# Altium PCB BPD30M.PcbDoc (part 1 of 2)
Units mm, origin at the board's own origin, x right, y up, seen from the top; angles counter-clockwise.
Board outline 65 x 70 mm, 4 copper layers (Top Layer, Ground, Power, Bottom Layer), stack 0.603 mm thick; 94 components, 61 nets, 303 pads, 160 vias.
Unrouted connection lines stored in the file: 9.
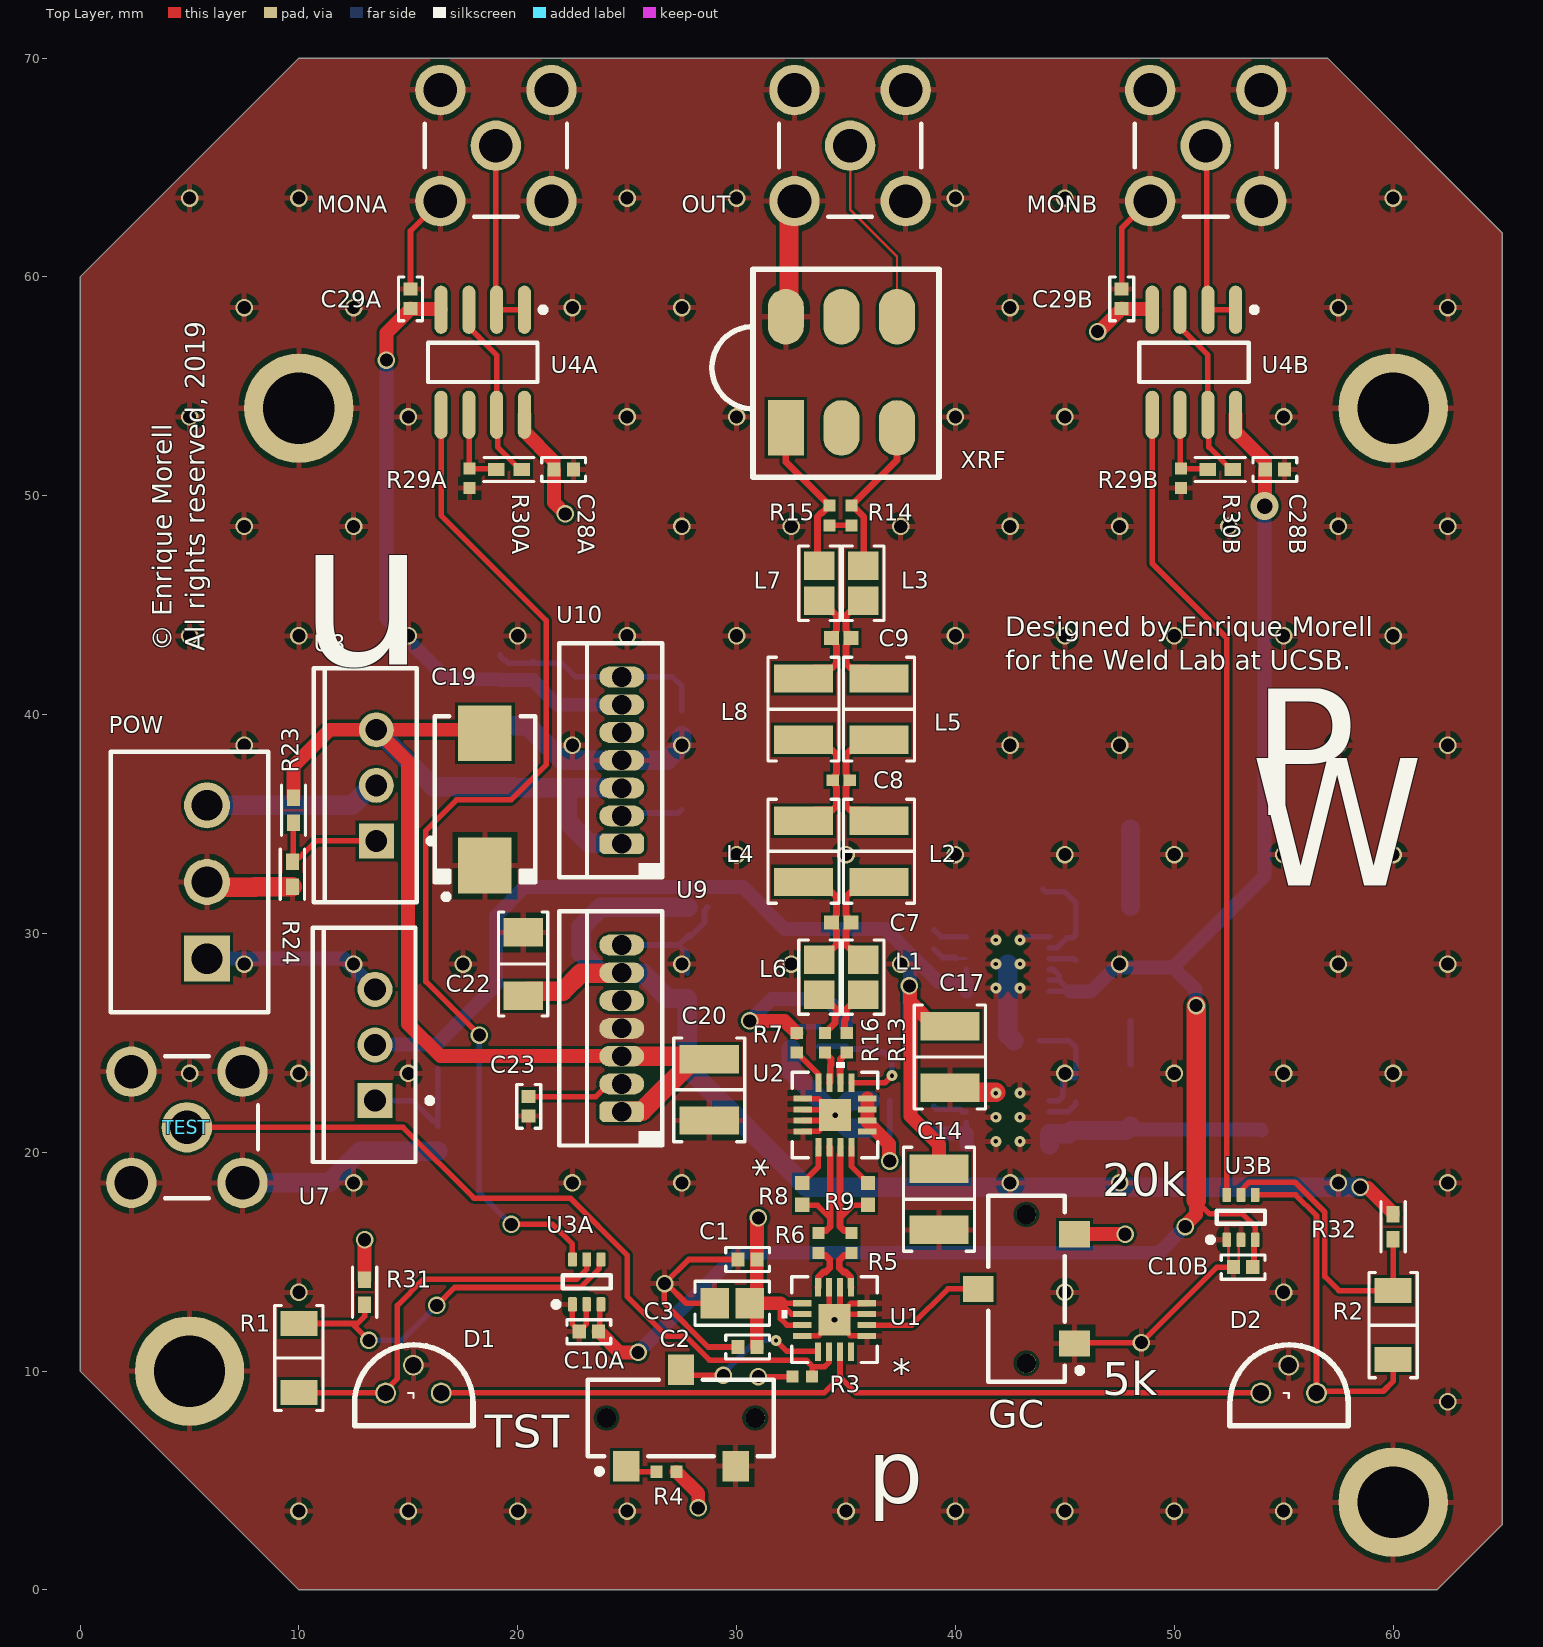
[diagram p0: Top Layer view]
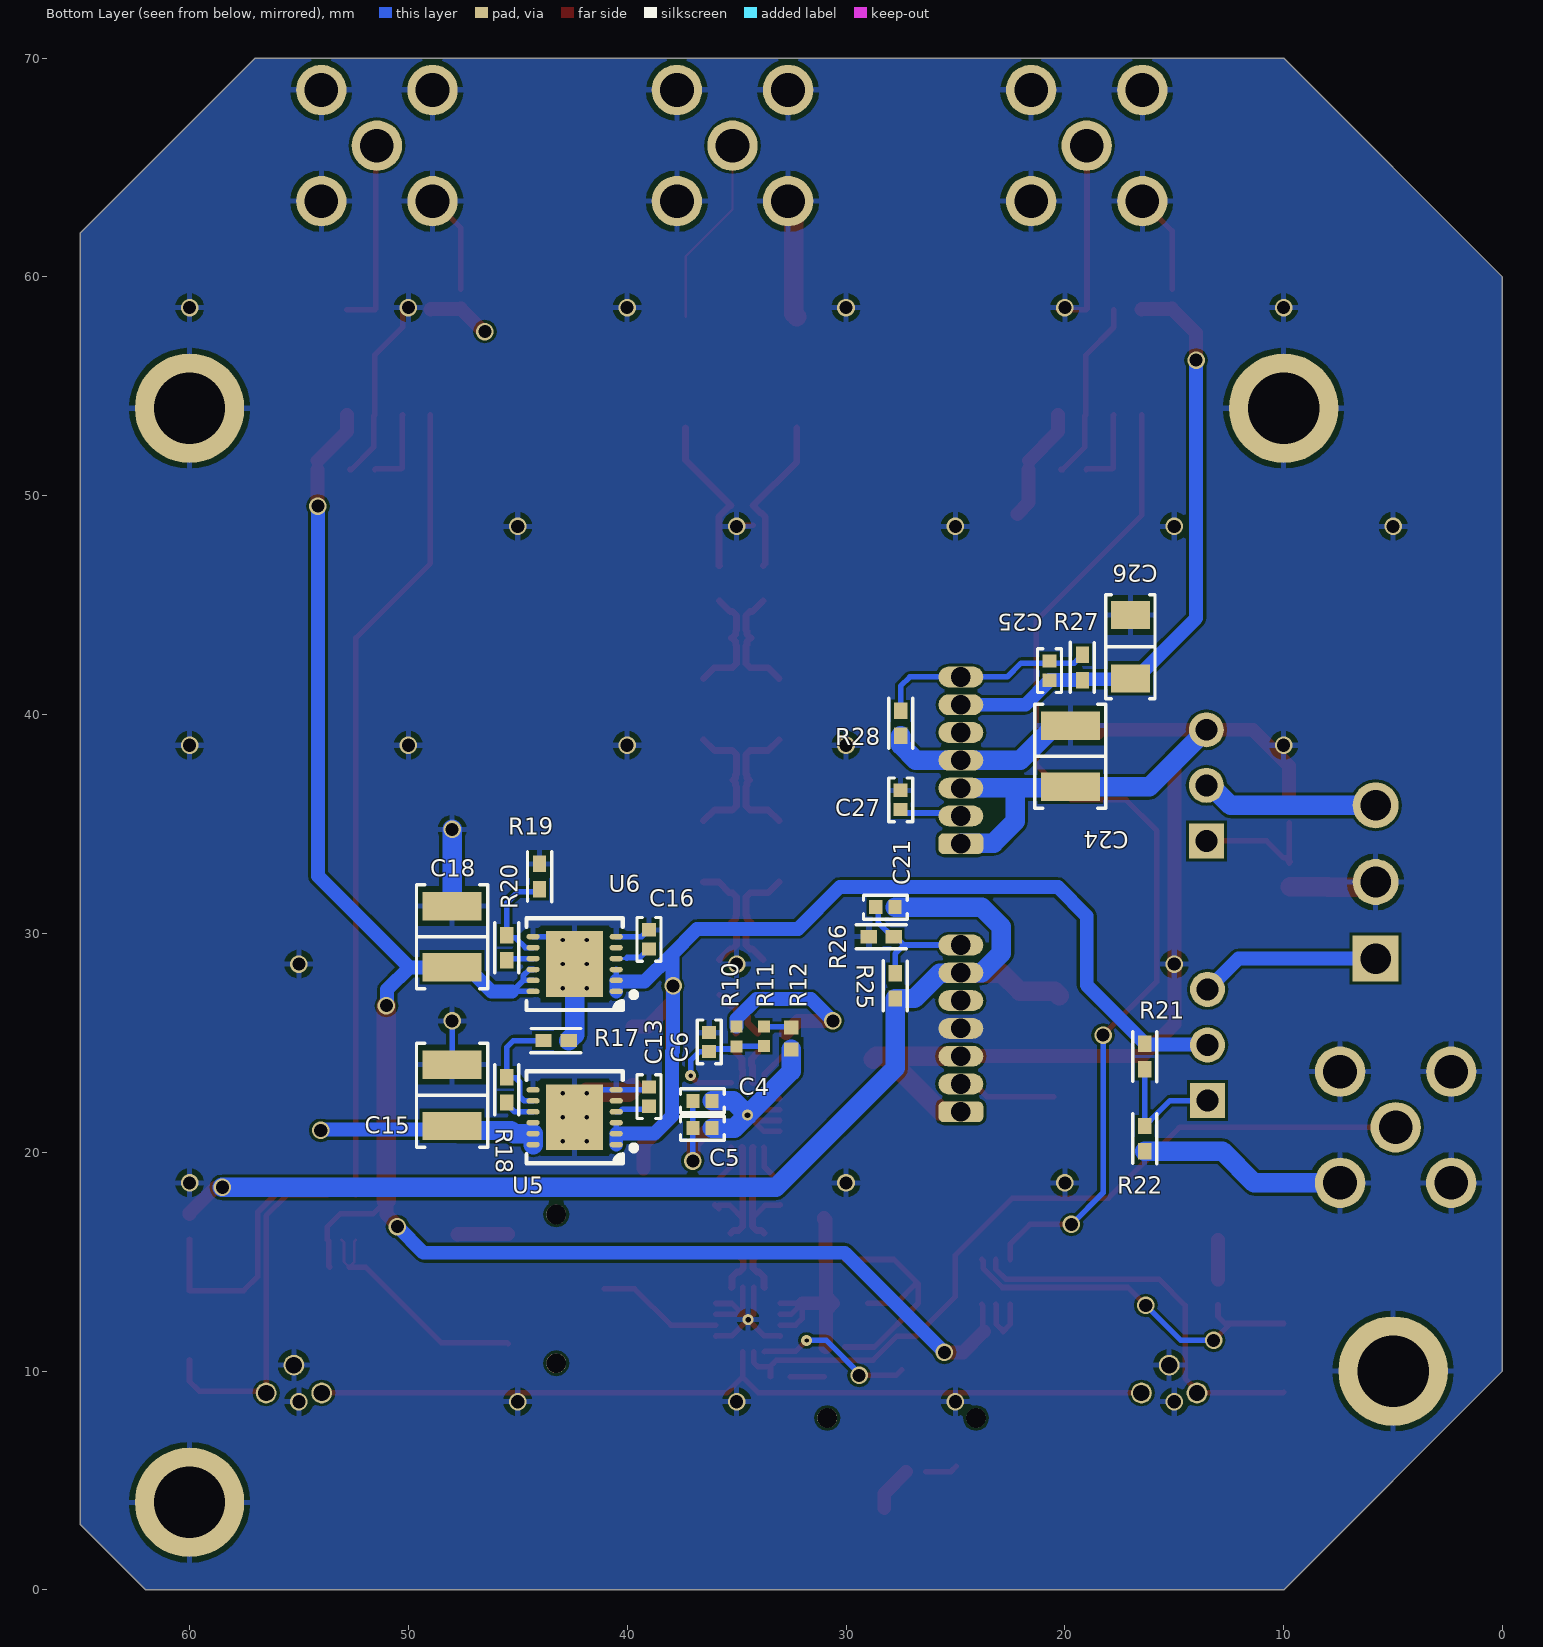
[diagram p1: Bottom Layer view, seen from below]
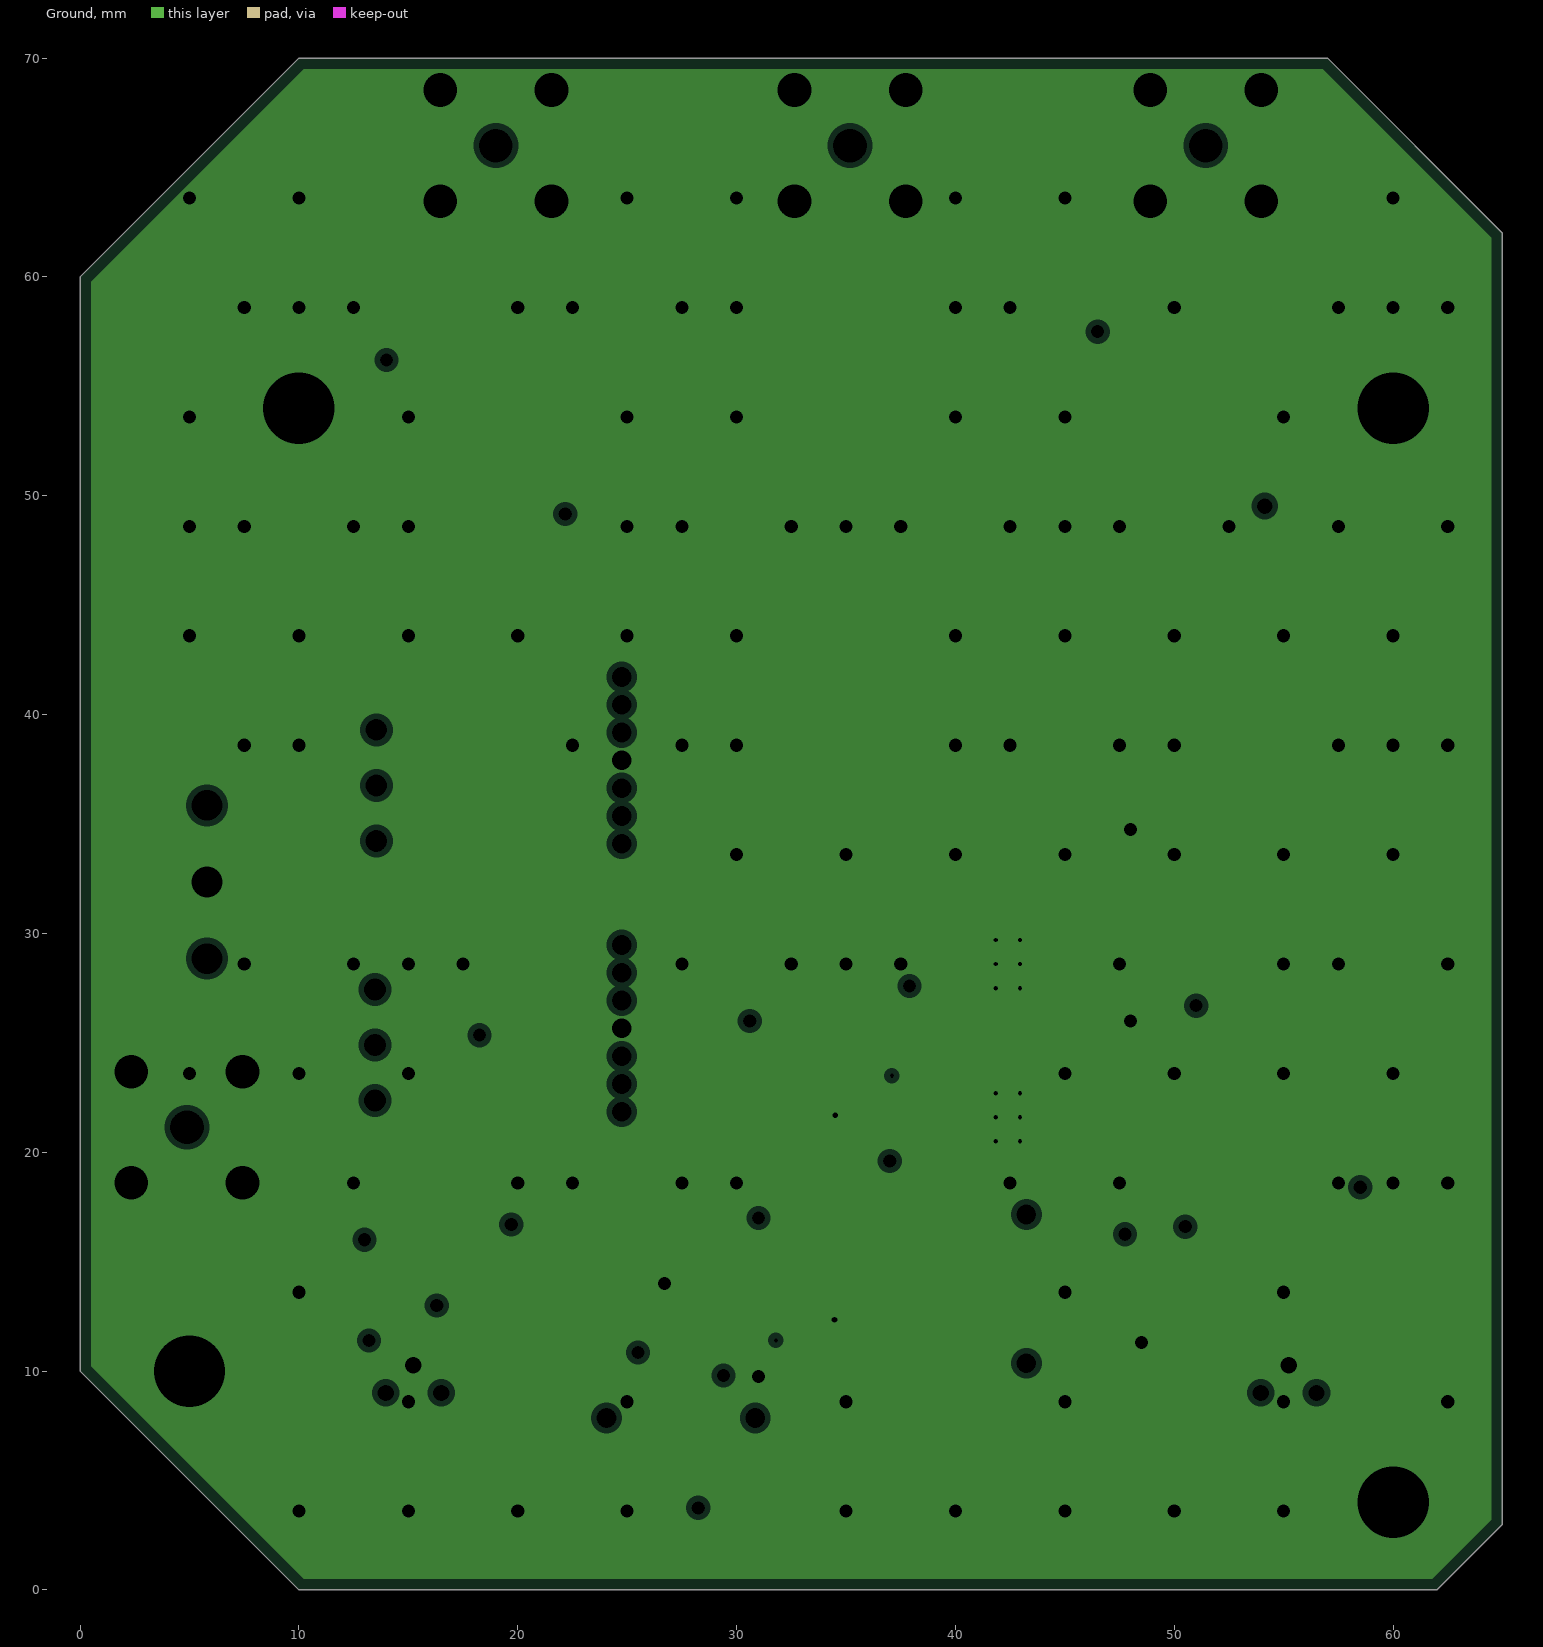
[diagram p2: Ground, clearances drawn from the general rule]
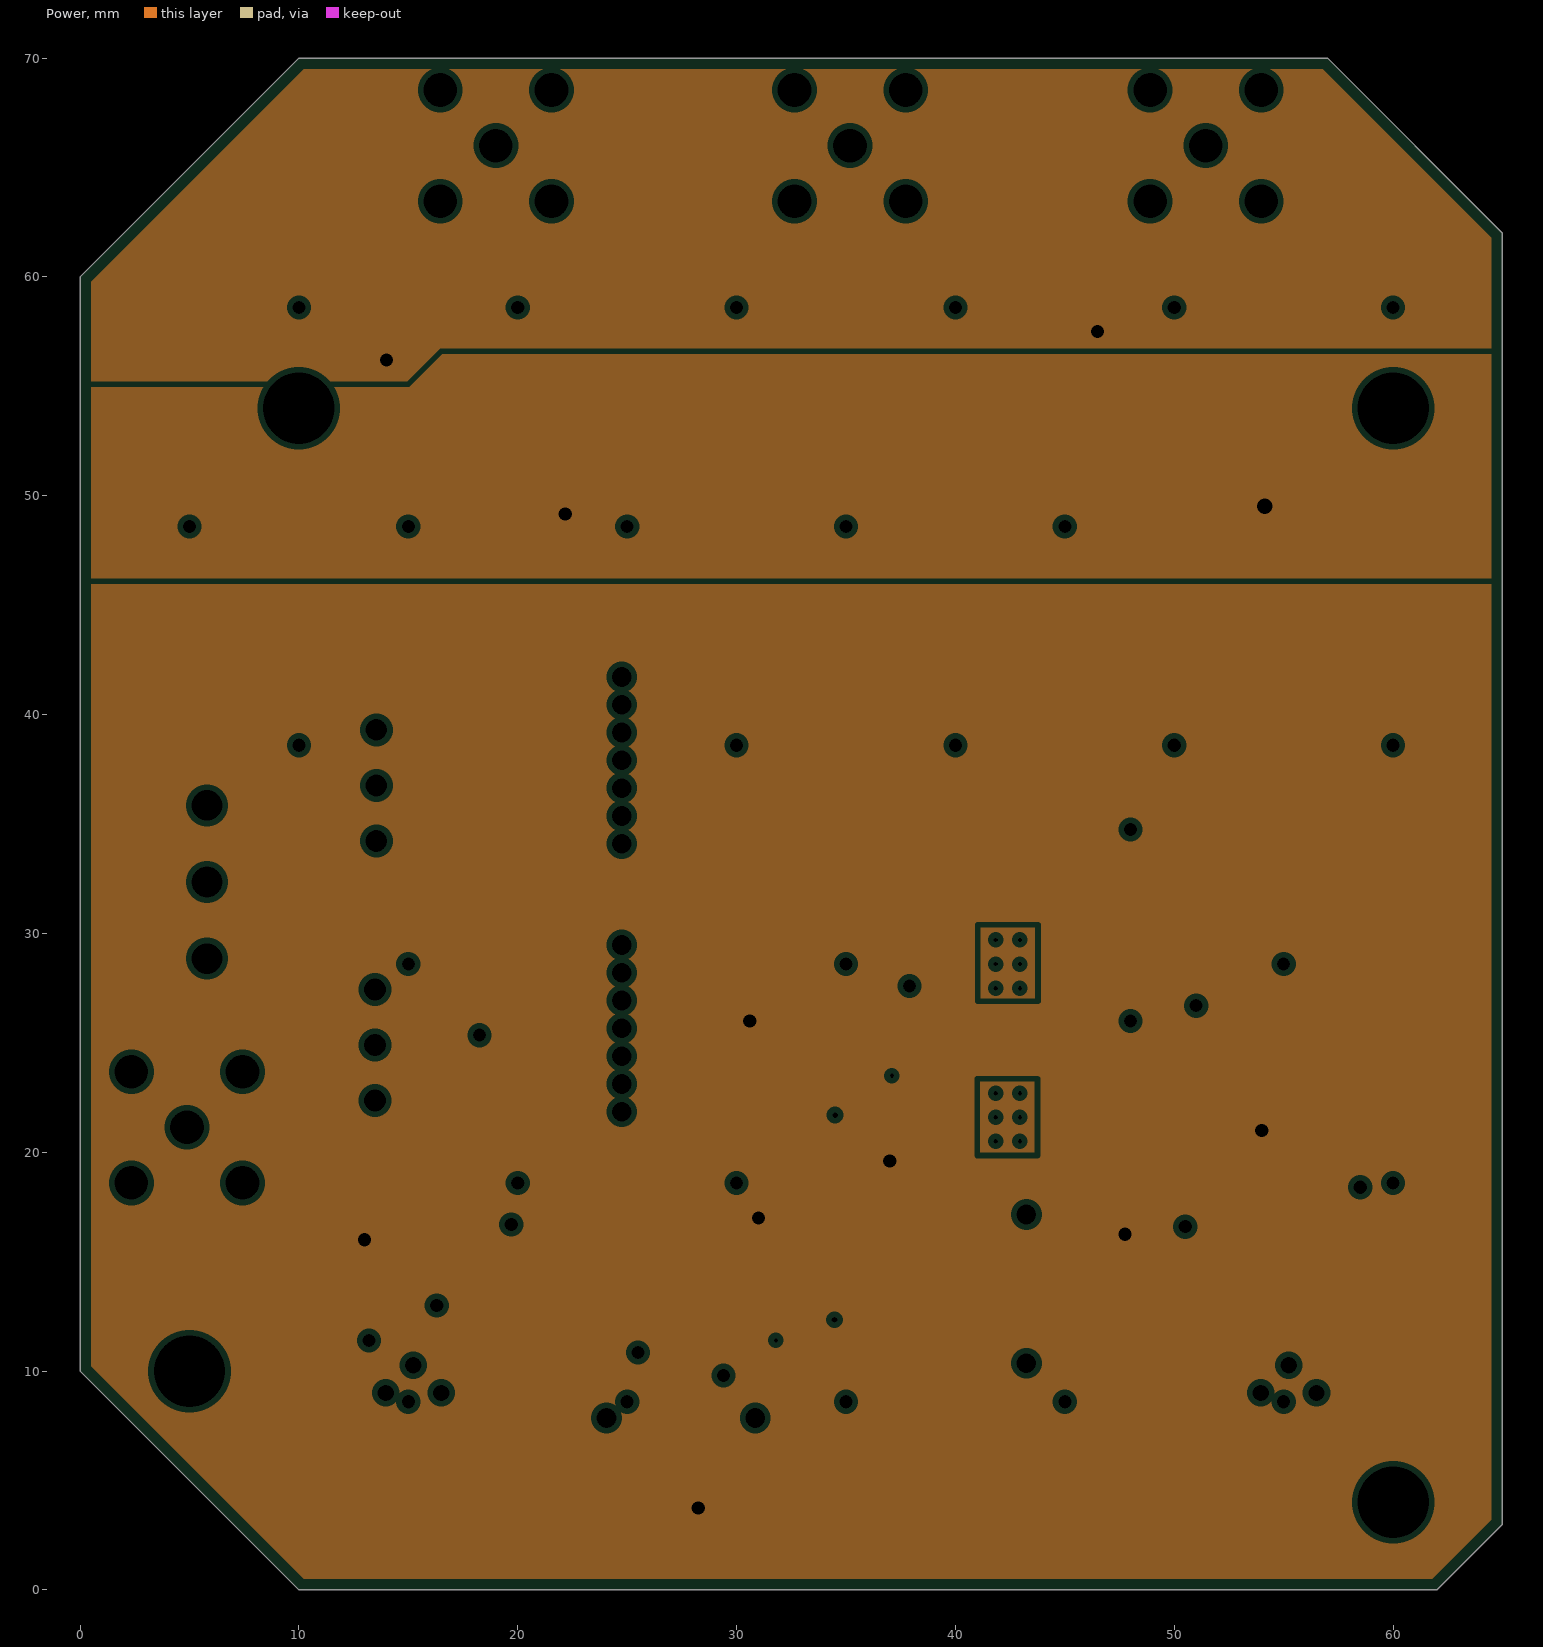
[diagram p3: Power, clearances drawn from the general rule]

## Layer stack, top to bottom
Top Solder: solder mask 0.0102, Solder Resist, Dk 3.5
Top Layer: signal copper 0.0356
Dielectric 2: prepreg 0.0711, PP-006, Dk 4.1
Ground: plane copper 0.035, net GND
Dielectric 1: dielectric 0.32, FR-4, Dk 4.8
Power: plane copper 0.035, net +3.3
Dielectric 3: prepreg 0.0711, PP-006, Dk 4.1
Bottom Layer: signal copper 0.0356
Bottom Solder: solder mask 0.0102, Solder Resist, Dk 3.5

## Board outline
0,10 0,60 10,70 57,70 65,62 65,3 62,0 10,0

## Design rules (kind name [scope] priority, off if disabled: settings)
Clearance [All] p1: gap=0.127 ignorepadtopadclearanceinfootprint=TRUE
DiffPairsRouting [All] p1: maxlimit=0.127 minlimit=0.127 mostfreqgap=0.127 toplayer_minwidth=0.112 toplayer_maxwidth=0.312 toplayer_prefwidth=0.312 bottomlayer_minwidth=0.112 bottomlayer_maxwidth=0.312 bottomlayer_prefwidth=0.312 substack1={B34EAC11-7F86-4681-921C-1BB5C2249E53} toplayer_{b34eac11-7f86-4681-921c-1bb5c2249e53}_minwidth=0.112 toplayer_{b34eac11-7f86-4681-921c-1bb5c2249e53}_maxwidth=1.081 toplayer_{b34eac11-7f86-4681-921c-1bb5c2249e53}_prefwidth=1.081 bottomlayer_{b34eac11-7f86-4681-921c-1bb5c2249e53}_minwidth=0.112 bottomlayer_{b34eac11-7f86-4681-921c-1bb5c2249e53}_maxwidth=1.081 bottomlayer_{b34eac11-7f86-4681-921c-1bb5c2249e53}_prefwidth=1.081 substack2={8114E6C0-BB00-449E-90CD-81B2BD7199C5} toplayer_{8114e6c0-bb00-449e-90cd-81b2bd7199c5}_minwidth=0.53 toplayer_{8114e6c0-bb00-449e-90cd-81b2bd7199c5}_maxwidth=1.081 toplayer_{8114e6c0-bb00-449e-90cd-81b2bd7199c5}_prefwidth=1.081 bottomlayer_{8114e6c0-bb00-449e-90cd-81b2bd7199c5}_minwidth=0.53 bottomlayer_{8114e6c0-bb00-449e-90cd-81b2bd7199c5}_maxwidth=1.081 bottomlayer_{8114e6c0-bb00-449e-90cd-81b2bd7199c5}_prefwidth=1.081 substack3={DB3756DD-58D4-456F-87B9-B91B800ABF71} toplayer_{db3756dd-58d4-456f-87b9-b91b800abf71}_minwidth=0.53 toplayer_{db3756dd-58d4-456f-87b9-b91b800abf71}_maxwidth=1.081 toplayer_{db3756dd-58d4-456f-87b9-b91b800abf71}_prefwidth=1.081 bottomlayer_{db3756dd-58d4-456f-87b9-b91b800abf71}_minwidth=0.53 bottomlayer_{db3756dd-58d4-456f-87b9-b91b800abf71}_maxwidth=1.081 bottomlayer_{db3756dd-58d4-456f-87b9-b91b800abf71}_prefwidth=1.081 impedanceprofiledriven=TRUE impedanceprofileid={59969D80-B7C6-4B87-8E7B-2783814E8AF6} impedanceprofilevalue=50.000000 maxuncoupledlength=12.7
HoleSize [All] p1: absolutevalues=TRUE maxlimit=4 minlimit=0.025 maxpercent=80.000 minpercent=20.000
MinimumSolderMaskSliver [All] p1: minsoldermaskwidth=0.1
PlaneClearance [All] p1: clearance=0.254
PlaneConnect PlaneConnect_1 [InComponent(U10, U5, U6, U9) or InNetClass('Power')] p1: planeconnectstyle=Direct reliefexpansion=0.508 reliefentries=4 reliefconductorwidth=0.254 reliefairgap=0.254
PlaneConnect [All] p2: planeconnectstyle=Relief reliefexpansion=0.508 reliefentries=4 reliefconductorwidth=0.254 reliefairgap=0.254
PolygonConnect [All] p1: connectstyle=Relief reliefconductorwidth=0.254 reliefentries=4 polygonreliefangle="90 Angle" airgapwidth=0.254
RoomDefinition U_BufferB [InComponentClass('U_BufferB')] p1: confinementstyle=ConfineIn formatcopy=TRUE lockcomponents=FALSE outline 45.096,48.608 59.056,48.608 59.056,81.6 45.096,81.6
RoomDefinition U_VSupply_1 [InComponentClass('U_VSupply4')] p2: confinementstyle=ConfineIn formatcopy=TRUE lockcomponents=FALSE outline 0.75,18.85 30.75,18.85 30.75,45.85 0.75,45.85
RoomDefinition U_VSupply3 [InComponentClass('U_VSupply3')] p3: confinementstyle=ConfineIn formatcopy=TRUE lockcomponents=FALSE outline 37.296,15.146 37.296,20.554 37.796,20.554 37.796,27.054 38.171,27.054 38.171,31.054 39.196,31.054 39.196,31.479 43.146,31.479 43.146,34.129 44.854,34.129 44.854,32.554 49.954,32.554 49.954,19.896 45.279,19.896 45.279,18.721 41.204,18.721 41.204,15.146
RoomDefinition U_TIASch [InComponentClass('U_TIASch')] p4: confinementstyle=ConfineIn formatcopy=TRUE lockcomponents=FALSE outline -7.722,16.536 -7.722,25.744 9.486,25.744 9.486,18.368 47.197,18.368 47.197,9.144 38.179,9.144 38.179,6.871 32.068,6.871 32.068,3.903 22.844,3.903 22.844,16.536
RoomDefinition U_SingEndOutput [InComponentClass('U_SingEndOutput')] p5: confinementstyle=ConfineIn formatcopy=TRUE lockcomponents=FALSE outline 28,50.35 41.25,50.35 41.25,81.6 28,81.6
RoomDefinition U_MonAmpB [InComponentClass('U_MonAmpB')] p6: confinementstyle=ConfineIn formatcopy=TRUE lockcomponents=FALSE outline 50.65,13 55.4,13 55.4,20.5 50.65,20.5
RoomDefinition U_MonAmpA [InComponentClass('U_MonAmpA')] p7: confinementstyle=ConfineIn formatcopy=TRUE lockcomponents=FALSE outline 20.75,10.05 25.5,10.05 25.5,17.55 20.75,17.55
RoomDefinition U_LPFilter [InComponentClass('U_LPFilter')] p8: confinementstyle=ConfineIn formatcopy=TRUE lockcomponents=FALSE outline 31.106,31.046 31.106,42.954 32.556,42.954 32.556,48.029 33.521,48.029 33.521,50.279 34.521,50.279 35.979,50.279 35.979,48.029 37.014,48.029 37.014,42.954 38.464,42.954 38.464,31.046 37.014,31.046 37.014,25.971 35.764,25.971 35.764,23.821 33.306,23.821 33.306,25.971 32.556,25.971 32.556,31.046
RoomDefinition U_DiffAmp [InComponentClass('U_DiffAmp')] p9: confinementstyle=ConfineIn formatcopy=TRUE lockcomponents=FALSE outline 30.612,18.52 30.612,24.362 31.671,24.362 31.671,26.529 33.329,26.529 33.329,26.479 34.479,26.479 34.479,26.467 35.729,26.467 35.729,26.369 37.129,26.369 37.129,23.229 37.889,23.229 37.889,20.221 36.984,20.221 36.984,18.52 36.829,18.52 36.829,16.771 32.171,16.771 32.171,18.52
RoomDefinition U_DetectionSch [InComponentClass('U_DetectionSch')] p10: confinementstyle=ConfineIn formatcopy=TRUE lockcomponents=FALSE outline 62.5,18.6 51.5,18.6 51.5,4.6 62.5,4.6
RoomDefinition U_BufferA [InComponentClass('U_BufferA')] p11: confinementstyle=ConfineIn formatcopy=TRUE lockcomponents=FALSE outline 12.596,48.608 26.556,48.608 26.556,81.6 12.596,81.6
RoutingVias [All] p1: holewidth=0.6 width=0.8 viastyle="Through Hole" minholewidth=0.6 minwidth=0.8 maxholewidth=0.711 maxwidth=1.27
SilkToSilkClearance [All] p1: silktosilkclearance=0.15
SilkToSolderMaskClearance [IsPad] p1: minsilkscreentomaskgap=0.15 clearancetoexposedcopper=TRUE
SolderMaskExpansion SolderMaskExpansion_1 [HasFootprint('TI VQFN-16 (3x3)')] p1: expansion=0.04
SolderMaskExpansion [All] p2: expansion=0.05
Width Width_3 [InNet('NetOUT_S')] p1: maxlimit=0.112 minlimit=0.112 preferedwidth=0.112 substack1={B34EAC11-7F86-4681-921C-1BB5C2249E53} toplayer_{b34eac11-7f86-4681-921c-1bb5c2249e53}_minwidth=0.53 toplayer_{b34eac11-7f86-4681-921c-1bb5c2249e53}_maxwidth=0.53 toplayer_{b34eac11-7f86-4681-921c-1bb5c2249e53}_prefwidth=0.53 bottomlayer_{b34eac11-7f86-4681-921c-1bb5c2249e53}_minwidth=0.53 bottomlayer_{b34eac11-7f86-4681-921c-1bb5c2249e53}_maxwidth=0.53 bottomlayer_{b34eac11-7f86-4681-921c-1bb5c2249e53}_prefwidth=0.53 substack2={8114E6C0-BB00-449E-90CD-81B2BD7199C5} toplayer_{8114e6c0-bb00-449e-90cd-81b2bd7199c5}_minwidth=0.53 toplayer_{8114e6c0-bb00-449e-90cd-81b2bd7199c5}_maxwidth=0.53 toplayer_{8114e6c0-bb00-449e-90cd-81b2bd7199c5}_prefwidth=0.53 bottomlayer_{8114e6c0-bb00-449e-90cd-81b2bd7199c5}_minwidth=0.53 bottomlayer_{8114e6c0-bb00-449e-90cd-81b2bd7199c5}_maxwidth=0.53 bottomlayer_{8114e6c0-bb00-449e-90cd-81b2bd7199c5}_prefwidth=0.53 substack3={DB3756DD-58D4-456F-87B9-B91B800ABF71} toplayer_{db3756dd-58d4-456f-87b9-b91b800abf71}_minwidth=0.53 toplayer_{db3756dd-58d4-456f-87b9-b91b800abf71}_maxwidth=0.53 toplayer_{db3756dd-58d4-456f-87b9-b91b800abf71}_prefwidth=0.53 bottomlayer_{db3756dd-58d4-456f-87b9-b91b800abf71}_minwidth=0.53 bottomlayer_{db3756dd-58d4-456f-87b9-b91b800abf71}_maxwidth=0.53 bottomlayer_{db3756dd-58d4-456f-87b9-b91b800abf71}_prefwidth=0.53 impedanceprofiledriven=TRUE impedanceprofileid={811DDE81-CFC1-41F3-9E2C-6F197AB258C6} impedanceprofilevalue=50.000000 minimp=50.000000 maximp=50.000000 favimp=50.000000
Width Width_1 [InNet('GND')] p2: maxlimit=0.889 minlimit=0.127 preferedwidth=0.254
Width Width_2 [InNetClass('Power')] p3: maxlimit=0.889 minlimit=0.127 preferedwidth=0.635
Width [All] p4: maxlimit=0.254 minlimit=0.127 preferedwidth=0.254
23 further rules are at their usual default settings.

## Classes and differential pairs
net class Power: +3.3 +5 +5N +12 -3.3 -5 -5N -12 GND
component class U_VSupply4: C19 C20 C21 C22 C23 C24 C25 C26 C27 POW R21 R22 R23 R24 R25 R26 R27 R28 U7 U8 U9 U10
component class "U_DetectionSch 1": D1 R1 R31
channel class MonitorAmp: U_MonAmpA U_MonAmpB
channel class BufferOut: U_BufferA U_BufferB
component class U_VSupply3: C13 C14 C15 C16 C17 C18 R17 R18 R19 R20 U5 U6
component class U_TIASch: C1 C2 C3 GC J1 R3 R4 R5 R6 TEST TST U1
component class U_SingEndOutput: * J2 OUT XRF
component class U_MonAmpB: C10B U3B
component class U_MonAmpA: C10A U3A
component class U_LPFilter: C7 C8 C9 L1 L2 L3 L4 L5 L6 L7 L8 R13 R14 R15 R16
component class U_DiffAmp: C4 C5 C6 R7 R8 R9 R10 R11 R12 U2
component class U_DetectionSch: D2 R2 R32
component class U_BufferB: C28B C29B J3_U_BufferB MONB R29B R30B U4B
component class U_BufferA: C28A C29A J3_U_BufferA MONA R29A R30A U4A
differential pair TOUT: +TOUT_P -TOUT_N
differential pair OUT: +OUT_P -OUT_N
differential pair FS: +FS_P -FS_N
differential pair F4: +F4_P -F4_N
differential pair F3: +F3_P -F3_N
differential pair F2: +F2_P -F2_N
differential pair F1: +F1_P -F1_N
differential pair BS: +BS_P -BS_N

## Components (designator, comment, footprint, x,y, rotation, side; value= is the part's Value field where it differs from the comment)
C1 "10000pF" "CAP 0402/1005" 30.5,15.1 r0 top
C2 "0.10uF" "CAP 0402/1005" 30.5,11.1 r0 top
C3 "3.3uF" "CAP 0805/2012" 29.8,13.1 r0 top
C4 "1000pF" "CAP 0402/1005" 36.56,22.35 r0 bottom
C5 "0.10uF" "CAP 0402/1005" 36.56,21.1 r0 bottom
C6 "0.10uF" "CAP 0402/1005" 36.25,25.04 r270 bottom
C7 "04025A680FAT2A" CAPC1005X56X25NL10T15 34.785,30.5 r180 top
C8 "GRM1555C1H111JA01D" CAPC1005X55X25LL05T10 34.785,37 r0 top
C9 "04025A680FAT2A" CAPC1005X56X25NL10T15 34.785,43.5 r0 top
C10A "0.10uF" "CAP 0402/1005" 23.25,11.8 r0 top (schematic designator C10)
C10B "0.10uF" "CAP 0402/1005" 53.15,14.75 r0 top (schematic designator C10)
C13 "10000pF" "CAP 0402/1005" 39,22.54 r90 bottom
C14 "10uF" "CAP 1210/3225 - 2.8MM" 39.25,17.85 r90 top
C15 "10uF" "CAP 1210/3225 - 2.8MM" 48,22.6 r270 bottom
C16 "10000pF" "CAP 0402/1005" 39,29.725 r90 bottom
C17 "10uF" "CAP 1210/3225 - 2.8MM" 39.75,24.35 r90 top
C18 "10uF" "CAP 1210/3225 - 2.8MM" 48,29.85 r270 bottom
C19 "10uF" "CAP POL 2917/7343" 18.5,36.125 r90 top
C20 "10uF" "CAP 1210/3225 - 2.8MM" 28.75,22.85 r90 top
C21 "10000pF" "CAP 0402/1005" 28.2,31.2 r0 bottom
C22 "47uF" "CAP 1206/3216" 20.25,28.6 r270 top
C23 "0.10uF" "CAP 0402/1005" 20.5,22.1 r90 top
C24 "10uF" "CAP 1210/3225 - 2.8MM" 19.75,38.1 r270 bottom
C25 "10000pF" "CAP 0402/1005" 20.7,42.007 r90 bottom
C26 "47uF" "CAP 1206/3216" 17,43.1 r270 bottom
C27 "0.10uF" "CAP 0402/1005" 27.5,36.1 r270 bottom
C28A "0.10uF" "CAP 0402/1005" 22.1,51.2 r180 top (schematic designator C28)
C28B "0.10uF" "CAP 0402/1005" 54.6,51.2 r180 top (schematic designator C28)
C29A "0.10uF" "CAP 0402/1005" 15.1,59 r270 top (schematic designator C29)
C29B "0.10uF" "CAP 0402/1005" 47.6,59 r270 top (schematic designator C29)
D1 "S5973-02" TO-18 16.5,9 r180 top value=Green
D2 "S5973-02" TO-18 56.5,9 r180 top value=Green
GC "CL-SB-12B-01T" SW_CL-SB-12B-01 43.7,13.8 r90 top (schematic designator "Gain Control")
L1 "120nH" "FER 0805/2012" 35.785,28 r90 top
L2 "500nH" "CAP 1210/3225 - 1.2MM" 36.51,33.75 r90 top
L3 "120nH" "FER 0805/2012" 35.785,46 r90 top
L4 "500nH" "CAP 1210/3225 - 1.2MM" 33.06,33.75 r90 top
L5 "500nH" "CAP 1210/3225 - 1.2MM" 36.51,40.25 r90 top
L6 "120nH" "FER 0805/2012" 33.785,28 r90 top
L7 "120nH" "FER 0805/2012" 33.785,46 r90 top
L8 "500nH" "CAP 1210/3225 - 1.2MM" 33.06,40.25 r90 top
MONA "0731000114" "MOLEX SD-73100-0114" 19,66 r90 top (schematic designator MON)
MONB "0731000114" "MOLEX SD-73100-0114" 51.437,66 r90 top (schematic designator MON)
OUT "0731000114" "MOLEX SD-73100-0114" 35.187,66 r90 top
POW "691321100003" 691321100003 5,32.35 r90 top
R1 "1" "STACKPOLE CSR1206" 10,10.6 r270 top
R2 "1" "STACKPOLE CSR1206" 60,12.1 r270 top
R3 "49.9" RESC1005X40X25NL05T05 33,9.75 r180 top
R4 "1k" RESC1005X40X25NL05T05 26.8,5.4 r180 top
R5 "ERJ-2RKF2490X" RESC1005X40X25NL05T05 35.25,15.85 r270 top
R6 "ERJ-2RKF2490X" RESC1005X40X25NL05T05 33.75,15.85 r270 top
R7 "1k" RESC1005X40X25NL05T05 32.75,25 r90 top
R8 "ERJ-2RKF2491X" RESC1005X40X25ML05T05 33,18.1 r90 top
R9 "ERJ-2RKF2491X" RESC1005X40X25ML05T05 36,18.1 r90 top
R10 "1k" RESC1005X40X25NL05T05 35,25.288 r270 bottom
R11 "49.9" RESC1005X40X25NL05T05 33.75,25.3 r270 bottom
R12 "ERJ2RKF1201X" RESC1005X40X25ML05T05 32.5,25.2 r90 bottom
R13 "49.9" RESC1005X40X25NL05T05 35.035,25 r90 top
R14 "49.9" RESC1005X40X25NL05T05 35.25,49.1 r90 top
R15 "49.9" RESC1005X40X25NL05T05 34.25,49.1 r270 top
R16 "49.9" RESC1005X40X25NL05T05 34.035,25 r90 top
R17 "13.3k" "RES 0402/1005" 43.25,25.1 r180 bottom
R18 "23.2k" "RES 0402/1005" 45.5,22.85 r90 bottom
R19 "15k" "RES 0402/1005" 44,32.6 r90 bottom
R20 "47.5k" "RES 0402/1005" 45.5,29.35 r90 bottom
R21 "120" "RES 0402/1005" 16.35,24.375 r90 bottom
R22 "360" "RES 0402/1005" 16.35,20.625 r90 bottom
R23 "120" "RES 0402/1005" 9.75,35.625 r90 top
R24 "360" "RES 0402/1005" 9.7,32.7 r90 top
R25 "200k" "RES 0402/1005" 27.75,27.6 r270 bottom
R26 "110k" "RES 0402/1005" 28.385,29.85 r180 bottom
R27 "332k" "RES 0402/1005" 19.2,42.15 r270 bottom
R28 "102k" "RES 0402/1005" 27.5,39.6 r90 bottom
R29A "1k" RESC1005X40X25NL05T05 17.8,50.8 r90 top (schematic designator R29)
R29B "1k" RESC1005X40X25NL05T05 50.3,50.8 r90 top (schematic designator R29)
R30A "9.1k" "RES 0402/1005" 19.6,51.2 r0 top (schematic designator R30)
R30B "9.1k" "RES 0402/1005" 52.1,51.2 r0 top (schematic designator R30)
R31 "0.0" "RES 0402/1005" 13,13.6 r270 top
R32 "0.0" "RES 0402/1005" 60,16.6 r270 top
TEST "0731000114" "MOLEX SD-73100-0114" 4.882,21.14 r180 top
TST "CL-SB-12B-01T" SW_CL-SB-12B-01 27.5,7.4 r0 top
U1 "OPA857" "TI VQFN-16 (3x3)" 34.475,12.35 r180 top value=Value
U2 "THS4541IRGTT" "TI VQFN-16 (3x3)" 34.5,21.7 r90 top value=Value
U3A "INA212AIDCKT" DCK0006A_L 23.15,14.075 r90 top (schematic designator U3)
U3B "INA212AIDCKT" DCK0006A_L 53.05,17.025 r90 top (schematic designator U3)
U4A "ADA4075-2ARZ" ADI-R-8_N 18.4,56.1 r270 top (schematic designator U4)
U4B "ADA4075-2ARZ" ADI-R-8_N 50.9,56.1 r270 top (schematic designator U4)
U5 "LP38798SDE-ADJ/NOPB" "TI WSON-12 DNT" 42.4,21.6 r0 bottom value=Value
U6 "LP38798SDE-ADJ/NOPB" "TI WSON-12 DNT" 42.4,28.6 r0 bottom value=Value
U7 "LM350T" NDE0003A 13.478,24.902 r90 top
U8 "LM337T/NOPB" NDE0003A 13.534,36.766 r90 top
U9 "TPS7A3301KC" KC0007A 24.75,25.66 r180 top
U10 "TPS7A3301KC" KC0007A 24.75,37.91 r180 top
XRF "ADT1-1+" ADT1-1+ 34.75,55.85 r90 top

## Footprints (in the part's own frame and the unit in brackets; to place one, negate y for a bottom-side part, rotate by r counter-clockwise, add the part's x,y. Pads: shape width x height; smd on the part's side, far side on the other; paste and mask are expansions set on the pad)
691321100003 [mm] "Vertical PCB Header, pitch 3.5mm, 03p"
  rect 2.1x2.1 hole 1.4: 1(-3.5,-0.8)
  round 2.1 hole 1.4: 2(0,-0.8) 3(3.5,-0.8)
  silkscreen extent -5.95,-3.6 5.95,3.6, body extent -5.95,-3.6 5.95,3.6, height 9.3
ADI-R-8_N [mm] "SOIC, 8-Leads, Body 4.9x3.9mm, Pitch 1.27mm, IPC Medium Density"
  oval 2.2x0.6 smd: 1(-2.4,1.905) 2(-2.4,0.635) 3(-2.4,-0.635) 4(-2.4,-1.905) 5(2.4,-1.905) 6(2.4,-0.635) 7(2.4,0.635) 8(2.4,1.905)
  silkscreen extent -2.52,-2.5 0.9,2.88, body extent -2,-2.5 2,2.5, height 1.75
ADT1-1+ [mm]
  rect 2.54x1.65 smd: 1(-2.75,2.5)
  oval 2.54x1.65 smd: 2(-2.75,-0.04) 3(-2.75,-2.58) 4(2.33,-2.58) 5(2.33,-0.04) 6(2.33,2.5)
  silkscreen extent -5,-4.5 4.5,5.88
"CAP 0402/1005" [mm] "Chip Capacitor, 2-Leads, Body 1.02x0.51mm, IPC Medium Density"
  rect 0.6x0.64 smd: 1(-0.44,0) 2(0.44,0)
  silkscreen extent -1,-0.55 1,0.55, body extent -0.5,-0.26 0.5,0.26, height 0.52
"CAP 0805/2012" [mm] "Chip Capacitor, 2-Leads, Body 2.00x1.20mm, IPC Medium Density"
  rect 1.3x1.4 smd: 1(-0.8,0) 2(0.8,0)
  silkscreen extent -1.7,-1 1.7,1, body extent -1,-0.64 1,0.64, height 1.26
"CAP 1206/3216" [mm] "Chip Capacitor, 2-Leads, Body 3.25x1.60mm, IPC Medium Density"
  rect 1.3x1.8 smd: 1(-1.45,0) 2(1.45,0)
  silkscreen extent -2.38,-1.13 2.37,1.13, body extent -1.6,-0.81 1.6,0.81, height 1.62
"CAP 1210/3225 - 1.2MM" [mm] "Chip Capacitor, 2-Leads, Body 3.20x2.50mm, IPC Medium Density"
  rect 1.3x2.7 smd: 1(-1.4,0) 2(1.4,0)
  silkscreen extent -2.37,-1.63 2.38,1.62, body extent -1.6,-1.25 1.6,1.25, height 1.2
"CAP 1210/3225 - 2.8MM" [mm] "Chip Capacitor, 2-Leads, Body 3.20x2.50mm, IPC Medium Density"
  rect 1.3x2.7 smd: 1(-1.4,0) 2(1.4,0)
  silkscreen extent -2.37,-1.63 2.38,1.62, body extent -1.6,-1.25 1.6,1.25, height 2.8
"CAP POL 2917/7343" [mm] "Molded Capacitor, 2-Leads, Body 7.30x4.30mm, IPC Medium Density"
  rect 2.55x2.45 smd: 1(-3.025,0) 2(3.025,0)
  silkscreen extent -4.57,-2.3 3.8,2.3, body extent -3.65,-2.15 3.65,2.15, height 4.1
CAPC1005X55X25LL05T10 [mm] "Chip Capacitor, 2-Leads, Body 1.00x0.50mm, IPC High Density"
  rect 0.56x0.52 smd: 1(-0.39,0) 2(0.39,0)
  body extent -0.53,-0.28 0.53,0.28, height 0.55
CAPC1005X56X25NL10T15 [mm] "Chip Capacitor, 2-Leads, Body 1.00x0.50mm, IPC Medium Density"
  rect 0.68x0.64 smd: 1(-0.44,0) 2(0.44,0)
  body extent -0.55,-0.3 0.55,0.3, height 0.56
DCK0006A_L [mm] "SOT23, 6-Leads, Body 2.15x1.4mm, Pitch 0.65mm, IPC High Density"
  rrect25% 0.65x0.4 smd: 1(-1.025,0.65) 2(-1.025,0) 3(-1.025,-0.65) 4(1.025,-0.65) 5(1.025,0) 6(1.025,0.65)
  silkscreen extent -1.15,-1.1 0.3,1.52, body extent -1.14,-1 1.14,1, height 0.94
"FER 0805/2012" [mm] "Chip Ferrite, 2-Leads, Body 2.00x1.20mm, IPC Medium Density"
  rect 1.3x1.4 smd: 1(-0.8,0) 2(0.8,0)
  silkscreen extent -1.7,-0.95 1.7,0.95, body extent -1,-0.64 1,0.64, height 1.26
KC0007A [mm] "FM, 7-Leads, Body 10.16x4.58mm, Pitch 1.27mm"
  rrect50% 2.05x0.95 hole 0.9: 1(0,3.81)
  oval 2.05x0.95 hole 0.9: 2(0,2.54) 3(0,1.27) 4(0,0) 5(0,-1.27) 6(0,-2.54) 7(0,-3.81)
  silkscreen extent -1.85,-5.35 2.85,5.35, body extent -1.85,-5.35 2.85,5.35, height 15.11
"MOLEX SD-73100-0114" [mm]
  round 2.302 hole 1.54: G(-2.54,-2.54) G(2.54,-2.54)
  round 2.304 hole 1.54: G(-2.54,2.54) G(2.54,2.54) S(0,0)
  silkscreen extent -3.25,-3.25 1,3.25, body extent -3.12,-3.17 11.68,3.17, height 9.67
NDE0003A [mm] "FM, 3-Leads, Body 10.7x4.7mm, Pitch 2.54mm"
  rect 1.6x1.6 hole 1: 1(-2.54,0)
  round 1.6 hole 1: 2(0,0) 3(2.54,0)
  silkscreen extent -5.35,-2.63 5.35,2.85, body extent -5.4,-1.9 5.4,2.9, height 19.4
"RES 0402/1005" [mm] "Chip Resistor, 2-Leads, Body 1.0x0.5mm, IPC Medium Density"
  rect 0.75x0.6 smd: 1(-0.575,0) 2(0.575,0)
  silkscreen extent -1.15,-0.55 1.14,0.55, body extent -0.5,-0.25 0.5,0.25, height 0.35
RESC1005X40X25ML05T05 [mm] "Chip Resistor, 2-Leads, Body 1.00x0.50mm, IPC Low Density"
  rect 0.65x0.65 smd: 1(-0.5,0) 2(0.5,0)
  body extent -0.53,-0.27 0.53,0.28, height 0.4
RESC1005X40X25NL05T05 [mm] "Chip Resistor, 2-Leads, Body 1.00x0.50mm, IPC Medium Density"
  rect 0.55x0.55 smd: 1(-0.45,0) 2(0.45,0)
  body extent -0.53,-0.27 0.53,0.28, height 0.4
"STACKPOLE CSR1206" [mm] "Chip Resistor, 2-Leads, Body 3.13x1.55mm, IPC Medium Density"
  rect 1.15x1.7 smd: 1(-1.575,0) 2(1.575,0)
  silkscreen extent -2.4,-1.1 2.4,1.1, body extent -1.6,-0.78 1.6,0.77, height 0.55
SW_CL-SB-12B-01 [mm]
  rect 1.2x1.4 smd: 1(-2.544,-1.743) 2(-0.044,2.657) 3(2.456,-1.743)
  round 0.9 hole 0.9 unplated: MH1(-3.444,0.457) MH2(3.356,0.457)
  silkscreen extent -4.29,-2.11 4.21,2.21, body extent -4.29,-1.29 4.21,2.21, height 5.5
"TI VQFN-16 (3x3)" [mm]
  rect 0.85x0.28 smd paste-0.14: 1(-1.475,0.75) 2(-1.475,0.25) 3(-1.475,-0.25) 4(-1.475,-0.75) 9(1.475,-0.75) 10(1.475,-0.25) 11(1.475,0.25) 12(1.475,0.75)
  rect 0.28x0.85 smd paste-0.14: 5(-0.75,-1.475) 6(-0.25,-1.475) 7(0.25,-1.475) 8(0.75,-1.475) 13(0.75,1.475) 14(0.25,1.475) 15(-0.25,1.475) 16(-0.75,1.475)
  rect 1.45x1.45 smd paste-0.712: 17(0,0)
  round 0.508 hole 0.254: V(0,0)
  silkscreen extent -1.96,-1.96 2.41,1.96, body extent 0,0 0.25,0.25, height 0.25
"TI WSON-12 DNT" [mm] "WSON, 12-Leads, Body 4.00x4.00mm, Pitch 0.50mm, Thermal Pad 2.60x3.00mm, IPC Medium Density"
  oval 0.6x0.25 smd: 1(-1.9,1.25) 2(-1.9,0.75) 3(-1.9,0.25) 4(-1.9,-0.25) 5(-1.9,-0.75) 6(-1.9,-1.25) 7(1.9,-1.25) 8(1.9,-0.75) 9(1.9,-0.25) 10(1.9,0.25) 11(1.9,0.75) 12(1.9,1.25)
  rect 2.6x3 smd: 13(0,0)
  silkscreen extent -2.82,-2.1 2.2,2.1, body extent -2.05,-2.05 2.05,2.05, height 0.8
TO-18 [mm]
  round 0.95 hole 0.75: 1(2.54,0) 2(1.27,-1.27) 3(0,0)
  silkscreen extent -1.45,-2.2 3.95,1.5

## Part data
C1 C13 C16 C21 C25: library part C0402C103J4RACTU, "CAP CER 10000PF 16V X7R 0402", Device Package="0402 (1005 Metric)", Manufacturer=Kemet, Supplier Part Number 1=399-1039-2-ND, TemperatureCoefficient=X7R, TemperatureRange="-55C ~ 125C", Tolerance=5%, Voltage=16V, ComponentLink1Description=Datasheet, ComponentLink1URL=http://www.kemet.com/docfinder?Partnumber=C0402C103J4RACTU, ComponentLink2Description="Digi-Key Listing", ComponentLink2URL=https://www.digikey.com/product-detail/en/kemet/C0402C103J4RACTU/399-1039-2-ND/411041, PartId=12588, Part Number=C0402C103J4RACTU, Price=0.0784, Supplier 1=Digi-Key
C2 C5 C6 C10A C10B C23 C27 C28A C28B C29A C29B: library part GRM155R71C104JA88D, "CAP CER 0.1UF 16V X7R 0402", Device Package="0402 (1005 Metric)", Manufacturer="Murata Electronics North America", Supplier Part Number 1=490-6327-2-ND, TemperatureCoefficient=X7R, TemperatureRange="-55C ~ 125C", Tolerance=5%, Voltage=16V, ComponentLink1Description=Datasheet, ComponentLink1URL=http://www.murata.com/~/media/webrenewal/support/library/catalog/products/capacitor/mlcc/c02e.pdf, ComponentLink2Description="Digi-Key Listing", ComponentLink2URL=https://www.digikey.com/product-detail/en/murata-electronics-north-america/GRM155R71C104JA88D/490-6327-2-ND/2610891, PartId=12366, Part Number=GRM155R71C104JA88D, Price=0.0046, Supplier 1=Digi-Key
C3: library part C2012X7R1C335K125AB, "CAP CER 3.3UF 16V X7R 0805", Device Package="0805 (2012 Metric)", Manufacturer="TDK Corporation", Supplier Part Number 1=445-7582-2-ND, TemperatureCoefficient=X7R, TemperatureRange="-55C ~ 125C", Tolerance=10%, Voltage=16V, ComponentLink1Description=Datasheet, ComponentLink1URL=https://product.tdk.com/info/en/catalog/datasheets/mlcc_commercial_general_en.pdf, ComponentLink2Description="Digi-Key listing", ComponentLink2URL=http://digikey.com/product-detail/en/C2012X7R1C335K125AB/445-7582-2-ND/2733017, PartId=4679, Part Number=C2012X7R1C335K125AB, Price=0.1162, Supplier 1=Digi-Key, Type=-
C4: library part C0402C102K3RACTU, "CAP CER 1000PF 25V X7R 0402", Device Package="0402 (1005 Metric)", Manufacturer=Kemet, Supplier Part Number 1=399-1031-2-ND, TemperatureCoefficient=X7R, TemperatureRange="-55C ~ 125C", Tolerance=10%, Voltage=25V, ComponentLink1Description=Datasheet, ComponentLink1URL=http://www.kemet.com/docfinder?Partnumber=C0402C102K3RACTU, ComponentLink2Description="Digi-Key Listing", ComponentLink2URL=https://www.digikey.com/product-detail/en/kemet/C0402C102K3RACTU/399-1031-2-ND/411033, PartId=12420, Part Number=C0402C102K3RACTU, Price=0.0037, Supplier 1=Digi-Key
C7 C9: library part CMP-2008-02674-1, Manufacturer="AVX Interconnect / Elco", Part Number=04025A680FAT2A
C8: library part CMP-2008-04257-1, Manufacturer=Murata, Part Number=GRM1555C1H111JA01D
C14 C15 C17 C18 C20 C24: library part CL32B106KAJNNNE, "CAP CER 10UF 25V X7R 1210", Device Package="1210 (3225 Metric)", Manufacturer="Samsung Electro-Mechanics America, Inc.", Supplier Part Number 1=1276-1807-2-ND, TemperatureCoefficient=X7R, TemperatureRange="-55C ~ 125C", Tolerance=10%, Voltage=25V, ComponentLink1Description=Datasheet, ComponentLink1URL=http://www.samsungsem.com/kr/front/downloadcms.do?path=/kr/support/product-search/mlcc/__icsFiles/afieldfile/2014/11/05&fileName=C_CL32B106KAJNNNE.pdf, ComponentLink2Description="Digi-Key Listing", ComponentLink2URL=https://www.digikey.com/product-detail/en/samsung-electro-mechanics-america-inc/CL32B106KAJNNNE/1276-1807-2-ND/3887465, PartId=19187, Part Number=CL32B106KAJNNNE, Price=0.1715, Supplier 1=Digi-Key
C19: library part 293D106X0035D2TE3, "CAP TANT 10UF 35V 20% 2917", Device Package="2917 (7343 Metric)", Manufacturer="Vishay Sprague", Supplier Part Number 1=718-1046-2-ND, TemperatureRange="-55C ~ 125C", Tolerance=20%, Voltage=35V, ComponentLink1Description=Datasheet, ComponentLink1URL=http://www.vishay.com/docs/40002/293d.pdf, ComponentLink2Description="Digi-Key listing", ComponentLink2URL=http://digikey.com/product-detail/en/293D106X0035D2TE3/718-1046-2-ND/1559398, PartId=6869, Part Number=293D106X0035D2TE3, Price=0.3563, Supplier 1=Digi-Key, Type="General Purpose"
C22 C26: library part C3216X5R1E476M160AC, "CAP CER 47UF 25V X5R 1206", Device Package="1206 (3216 Metric)", Manufacturer="TDK Corporation", Supplier Part Number 1=445-8047-2-ND, TemperatureCoefficient=X5R, TemperatureRange="-55C ~ 85C", Tolerance=20%, Voltage=25V, ComponentLink1Description=Datasheet, ComponentLink1URL=https://product.tdk.com/info/en/catalog/datasheets/mlcc_commercial_general_en.pdf, ComponentLink2Description="Digi-Key Listing", ComponentLink2URL=https://www.digikey.com/product-detail/en/tdk-corporation/C3216X5R1E476M160AC/445-8047-2-ND/2792260, PartId=15844, Part Number=C3216X5R1E476M160AC, Price=0.4883, Supplier 1=Digi-Key
D1 D2: "The S5973-02 is a high-speed Si PIN photodiode des", Colour=Silver, Device Package=TO-18, Manufacturer=Hamamatsu, ComponentLink1Description=Datasheet, ComponentLink1URL=https://www.hamamatsu.com/resources/pdf/ssd/s5971_etc_kpin1025e.pdf, ComponentLink2Description="Hamamatsu Listing", ComponentLink2URL=https://www.hamamatsu.com/us/en/product/type/S5973-02/index.html, PartId=10872, Part Number=S5973-02, Price=32, Supplier 1=Hamamatsu, Supplier Part Number 1=S5973-02, Type=Through-Hole
GC TST: "SWITCH SLIDE SPDT 200MA 12V", Manufacturer="Nidec Copal Electronics", Operating Temperature="-40°C ~ 85°C", Supplier Part Number 1=563-1318-1-ND, Actuator Type=Standard, Circuit=SPDT, ComponentLink1Description=Datasheet, ComponentLink1URL=https://www.nidec-copal-electronics.com/e/catalog/switch/cl-sb.pdf, ComponentLink2Description="Digi-Key Listing", ComponentLink2URL=https://www.digikey.com/product-detail/en/nidec-copal-electronics/CL-SB-12B-01T/563-1318-1-ND/3507878, Mechanical Life="10,000 Cycles", PartId=16472, Part Number=CL-SB-12B-01T, Price=0.9, Series=CL-SB, Supplier 1=Digi-Key, Switch Function=On-On, Switch Travel=2.00mm, Type="Slide Switches"
L1 L3 L6 L7: library part MLF2012DR12M, "FIXED IND 120NH 300MA 200 MOHM", DC Resistance="200mOhm Max", Device Package="0805 (2012 Metric)", Manufacturer="TDK Corporation", Q at Frequency="20 @ 25MHz", Supplier Part Number 1=445-8984-1-ND, TemperatureRange="-55°C ~ 125°C", Tolerance=20%, ComponentLink1Description=Datasheet, ComponentLink1URL=https://product.tdk.com/info/en/catalog/datasheets/inductor_commercial_standard_mlf2012_en.pdf, ComponentLink2Description="Digi-Key listing", ComponentLink2URL=https://www.digikey.com/product-detail/en/tdk-corporation/MLF2012DR12M/445-8984-1-ND/3641578, PartId=6444, Part Number=MLF2012DR12M, Price=0.18, Shielding=Shielded, Supplier 1=Digi-Key, Type=Multilayer
L2 L4 L5 L8: library part 74479899150, "FIXED IND 500NH 3.8A 18 MOHM SMD", DC Resistance=18mOhm, Device Package="1210 (3225 Metric)", Manufacturer="Wurth Electronics Inc.", Q at Frequency="22 @ 1MHz", Supplier Part Number 1=732-7339-6-ND, TemperatureRange="-40°C ~ 125°C", Tolerance=20%, ComponentLink1Description=Datasheet, ComponentLink1URL=https://katalog.we-online.de/pbs/datasheet/74479899150.pdf, ComponentLink2Description="Digi-Key listing", ComponentLink2URL=https://www.digikey.com/product-detail/en/wurth-electronics-inc/74479899150/732-7339-6-ND/5353481, PartId=6443, Part Number=74479899150, Price=1.13, Shielding=Shielded, Supplier 1=Digi-Key, Type=Multilayer
MONA MONB OUT TEST: "CONN SMA RCPT R/A 50 OHM PCB", Dielectric Material="Polytetrafluoroethylene (PTFE)", Housing Colour=Gold, Manufacturer=Molex, Operating Temperature="-65°C ~ 165°C", Supplier Part Number 1=WM5525-ND, Voltage Rating=500V, Body Finish=Gold, Body Material=Brass, Center Contact Material=Gold, Center Contact Plating=Gold, ComponentLink1Description=Datasheet, ComponentLink1URL=https://www.molex.com/pdm_docs/sd/731000114_sd.pdf, ComponentLink2Description="Digi-Key Listing", ComponentLink2URL=https://www.digikey.com/product-detail/en/molex/0731000114/WM5525-ND/1465147, Contact Termination=Solder, Fastening Type=Threaded, Impedance="50 Ohm", Mounting Type="Through Hole, Right Angle", PartId=16436, Part Number=0731000114, Price=5.14, Series=73100, Shield Termination=Solder, Style=SMA, Supplier 1=Digi-Key, Type="Receptacle, Female Socket"
POW: library part CMP-1502-01784-1, "Serie 3211 - 3.50mm Vertical PCB Header WR-TBL, 3 pin", Manufacturer="Wurth Elektronik", Operating Temperature=-40to105degC, Datasheet URL=http://katalog.we-online.de/em/datasheet/6913211000xx.pdf, Gender=Male, Manufacturer URL=http://www.we-online.de, Mounting Technology=THT, Package Reference=691321100003, Packaging=Box, Part Number=691321100003, Pin Number=3, Pitch=3.50mm, Publisher=WurthElektronik
R1 R2: library part CSR1206FK1R00, "RES SMD 1 OHM 1% 1/2W 1206", Device Package="1206 (3216 Metric)", Manufacturer="Stackpole Electronics Inc.", PowerRating="0.5W, 1/2W", Supplier Part Number 1=CSR1206FK1R00TR-ND, TemperatureCoefficient=100ppm/C, TemperatureRange="-55C ~ 155C", Tolerance=1%, ComponentLink1Description=Datasheet, ComponentLink1URL=http://www.seielect.com/catalog/SEI-CSR_CSRN.pdf, ComponentLink2Description="Digi-Key Listing", ComponentLink2URL=https://www.digikey.com/product-detail/en/stackpole-electronics-inc/CSR1206FK1R00/CSR1206FK1R00TR-ND/1742410, PartId=9988, Part Number=CSR1206FK1R00, Price=0.051, Supplier 1=Digi-Key
R3 R11 R13 R14 R15 R16: library part CMP-2002-00969-1, Manufacturer=Panasonic, Part Number=ERJ-2RKF49R9X
R4 R7 R10 R29A R29B: library part CMP-2002-00606-3, "Chip Resistor, 1 KOhm, +/- 1%, 100 mW, -55 to 155 degC, 0402 (1005 Metric), RoHS, Tape and Reel", Case\/Package=0402, Case Code (Metric)=1005, Manufacturer="Basic Passives", Max Operating Temperature="155 degC", Min Operating Temperature="-55 degC", Package Quantity=10000, PartNumber=ERJ-2RKF1001X, Power Rating="100 mW", Resistance="1 KOhm", Tolerance=1%, Voltage Rating="50 V", Case Code (Imperial)=0402, ComponentLink1Description="Manufacturer URL", ComponentLink1URL=http://www.panasonic.com/, ComponentLink2Description=Datasheet, ComponentLink2URL=http://industrial.panasonic.com/cdbs/www-data/pdf/RDA0000/AOA0000C86.pdf, DatasheetVersion=04/2015, Height="0.35 mm", Length="1 mm", Mount="Surface Mount", Mounting Technology="Surface Mount", PackageDescription="2-Pin Surface Mount Device, Body 1 x 0.5 mm", PackageReference=0402, Packaging="Tape and Reel", Pins=2, Radiation Hardening=No, REACH SVHC=Yes, RoHSCompliant=true, Width="0.5 mm"
R5 R6: library part CMP-2002-00804-1, Manufacturer=Panasonic, Part Number=ERJ-2RKF2490X
R8: library part CMP-2002-00805-1, Manufacturer=Panasonic, Part Number=ERJ-2RKF2491X
R9: library part CMP-2002-00805-1, "2.49k", Manufacturer=Panasonic, Part Number=ERJ-2RKF2491X
R12: library part CMP-2002-01123-1, Manufacturer=Panasonic, Part Number=ERJ2RKF1201X
R17: library part ERJ-2RKF1332X, "RES SMD 13.3K OHM 1% 1/10W 0402", Device Package="0402 (1005 Metric)", Manufacturer="Panasonic Electronic Components", PowerRating="0.1W, 1/10W", Supplier Part Number 1=P13.3KLCT-ND, TemperatureCoefficient=100ppm/C, TemperatureRange="-55C ~ 155C", Tolerance=1%, ComponentLink1Description=Datasheet, ComponentLink1URL=http://industrial.panasonic.com/www-cgi/jvcr13pz.cgi?E+PZ+3+AOA0002+ERJ2RKF1332X+7+WW, ComponentLink2Description="Digikey listing", ComponentLink2URL=http://digikey.com/product-detail/en/ERJ-2RKF1332X/P13.3KLTR-ND/192120, PartId=334, Part Number=ERJ-2RKF1332X, Price=0.0043, Supplier 1=Digi-Key, Type="Thick Film"
R18: library part ERJ-2RKF2322X, "RES SMD 23.2K OHM 1% 1/10W 0402", Device Package="0402 (1005 Metric)", Manufacturer="Panasonic Electronic Components", PowerRating="0.1W, 1/10W", Supplier Part Number 1=P23.2KLTR-ND, TemperatureCoefficient=100ppm/C, TemperatureRange="-55C ~ 155C", Tolerance=1%, ComponentLink1Description=Datasheet, ComponentLink1URL=http://industrial.panasonic.com/www-cgi/jvcr13pz.cgi?E+PZ+3+AOA0002+ERJ2RKF2322X+7+WW, ComponentLink2Description="Digikey listing", ComponentLink2URL=http://digikey.com/product-detail/en/ERJ-2RKF2322X/P23.2KLTR-ND/192235, PartId=287, Part Number=ERJ-2RKF2322X, Price=0.0043, Supplier 1=Digi-Key, Type="Thick Film"
R19: library part ERJ-2RKF1502X, "RES SMD 15K OHM 1% 1/10W 0402", Device Package="0402 (1005 Metric)", Manufacturer="Panasonic Electronic Components", PowerRating="0.1W, 1/10W", Supplier Part Number 1=P15.0KLCT-ND, TemperatureCoefficient=100ppm/C, TemperatureRange="-55C ~ 155C", Tolerance=1%, ComponentLink1Description=Datasheet, ComponentLink1URL=http://industrial.panasonic.com/www-cgi/jvcr13pz.cgi?E+PZ+3+AOA0002+ERJ2RKF1502X+7+WW, ComponentLink2Description="Digi-Key Listing", ComponentLink2URL=https://www.digikey.com/product-detail/en/panasonic-electronic-components/ERJ-2RKF1502X/P15.0KLTR-ND/192143, PartId=12216, Part Number=ERJ-2RKF1502X, Price=0.0028, Supplier 1=Digi-Key
R20: library part ERJ-2RKF4752X, "RES SMD 47.5K OHM 1% 1/10W 0402", Device Package="0402 (1005 Metric)", Manufacturer="Panasonic Electronic Components", PowerRating="0.1W, 1/10W", Supplier Part Number 1=P47.5KLTR-ND, TemperatureCoefficient=100ppm/C, TemperatureRange="-55C ~ 155C", Tolerance=1%, ComponentLink1Description=Datasheet, ComponentLink1URL=http://industrial.panasonic.com/www-cgi/jvcr13pz.cgi?E+PZ+3+AOA0002+ERJ2RKF4752X+7+WW, ComponentLink2Description="Digikey listing", ComponentLink2URL=http://digikey.com/product-detail/en/ERJ-2RKF4752X/P47.5KLTR-ND/192375, PartId=180, Part Number=ERJ-2RKF4752X, Price=0.0043, Supplier 1=Digi-Key, Type="Thick Film"
R21 R23: library part ERJ-2RKF1200X, "RES SMD 120 OHM 1% 1/10W 0402", Device Package="0402 (1005 Metric)", Manufacturer="Panasonic Electronic Components", PowerRating="0.1W, 1/10W", Supplier Part Number 1=P120LTR-ND, TemperatureCoefficient=100ppm/C, TemperatureRange="-55C ~ 155C", Tolerance=1%, ComponentLink1Description=Datasheet, ComponentLink1URL=http://industrial.panasonic.com/www-cgi/jvcr13pz.cgi?E+PZ+3+AOA0002+ERJ2RKF1200X+7+WW, ComponentLink2Description="Digi-Key Listing", ComponentLink2URL=https://www.digikey.com/product-detail/en/panasonic-electronic-components/ERJ-2RKF1200X/P120LTR-ND/1746117, PartId=12223, Part Number=ERJ-2RKF1200X, Price=0.0028, Supplier 1=Digi-Key
R22 R24: library part ERJ-2RKF3600X, "RES SMD 360 OHM 1% 1/10W 0402", Device Package="0402 (1005 Metric)", Manufacturer="Panasonic Electronic Components", PowerRating="0.1W, 1/10W", Supplier Part Number 1=P360LTR-ND, TemperatureCoefficient=100ppm/C, TemperatureRange="-55C ~ 155C", Tolerance=1%, ComponentLink1Description=Datasheet, ComponentLink1URL=http://industrial.panasonic.com/www-cgi/jvcr13pz.cgi?E+PZ+3+AOA0002+ERJ2RKF3600X+7+WW, ComponentLink2Description="Digikey listing", ComponentLink2URL=http://digikey.com/product-detail/en/ERJ-2RKF3600X/P360LTR-ND/1746200, PartId=445, Part Number=ERJ-2RKF3600X, Price=0.0043, Supplier 1=Digi-Key, Type="Thick Film"
R25: library part ERJ-2RKF2003X, "RES SMD 200K OHM 1% 1/10W 0402", Device Package="0402 (1005 Metric)", Manufacturer="Panasonic Electronic Components", PowerRating="0.1W, 1/10W", Supplier Part Number 1=P200KLCT-ND, TemperatureCoefficient=100ppm/C, TemperatureRange="-55C ~ 155C", Tolerance=1%, ComponentLink1Description=Datasheet, ComponentLink1URL=http://industrial.panasonic.com/www-cgi/jvcr13pz.cgi?E+PZ+3+AOA0002+ERJ2RKF2003X+7+WW, ComponentLink2Description="Digikey listing", ComponentLink2URL=http://digikey.com/product-detail/en/ERJ-2RKF2003X/P200KLTR-ND/192216, PartId=17, Part Number=ERJ-2RKF2003X, Price=0.0043, Supplier 1=Digi-Key, Type="Thick Film"
R26: library part ERJ-2RKF1103X, "RES SMD 110K OHM 1% 1/10W 0402", Device Package="0402 (1005 Metric)", Manufacturer="Panasonic Electronic Components", PowerRating="0.1W, 1/10W", Supplier Part Number 1=P110KLTR-ND, TemperatureCoefficient=100ppm/C, TemperatureRange="-55C ~ 155C", Tolerance=1%, ComponentLink1Description=Datasheet, ComponentLink1URL=http://industrial.panasonic.com/www-cgi/jvcr13pz.cgi?E+PZ+3+AOA0002+ERJ2RKF1103X+7+WW, ComponentLink2Description="Digikey listing", ComponentLink2URL=http://digikey.com/product-detail/en/ERJ-2RKF1103X/P110KLTR-ND/192097, PartId=175, Part Number=ERJ-2RKF1103X, Price=0.0043, Supplier 1=Digi-Key, Type="Thick Film"
R27: library part ERJ-2RKF3323X, "RES SMD 332K OHM 1% 1/10W 0402", Device Package="0402 (1005 Metric)", Manufacturer="Panasonic Electronic Components", PowerRating="0.1W, 1/10W", Supplier Part Number 1=P332KLTR-ND, TemperatureCoefficient=100ppm/C, TemperatureRange="-55C ~ 155C", Tolerance=1%, ComponentLink1Description=Datasheet, ComponentLink1URL=http://industrial.panasonic.com/www-cgi/jvcr13pz.cgi?E+PZ+3+AOA0002+ERJ2RKF3323X+7+WW, ComponentLink2Description="Digikey listing", ComponentLink2URL=http://digikey.com/product-detail/en/ERJ-2RKF3323X/P332KLTR-ND/192308, PartId=225, Part Number=ERJ-2RKF3323X, Price=0.0043, Supplier 1=Digi-Key, Type="Thick Film"
R28: library part ERJ-2RKF1023X, "RES SMD 102K OHM 1% 1/10W 0402", Device Package="0402 (1005 Metric)", Manufacturer="Panasonic Electronic Components", PowerRating="0.1W, 1/10W", Supplier Part Number 1=P102KLTR-ND, TemperatureCoefficient=100ppm/C, TemperatureRange="-55C ~ 155C", Tolerance=1%, ComponentLink1Description=Datasheet, ComponentLink1URL=http://industrial.panasonic.com/www-cgi/jvcr13pz.cgi?E+PZ+3+AOA0002+ERJ2RKF1023X+7+WW, ComponentLink2Description="Digikey listing", ComponentLink2URL=http://digikey.com/product-detail/en/ERJ-2RKF1023X/P102KLTR-ND/192083, PartId=200, Part Number=ERJ-2RKF1023X, Price=0.0043, Supplier 1=Digi-Key, Type="Thick Film"
R30A R30B: library part ERJ-2RKF9101X, "RES SMD 9.1K OHM 1% 1/10W 0402", Device Package="0402 (1005 Metric)", Manufacturer="Panasonic Electronic Components", PowerRating="0.1W, 1/10W", Supplier Part Number 1=P9.10KLTR-ND, TemperatureCoefficient=100ppm/C, TemperatureRange="-55C ~ 155C", Tolerance=1%, ComponentLink1Description=Datasheet, ComponentLink1URL=http://industrial.panasonic.com/www-cgi/jvcr13pz.cgi?E+PZ+3+AOA0002+ERJ2RKF9101X+7+WW, ComponentLink2Description="Digikey listing", ComponentLink2URL=http://digikey.com/product-detail/en/ERJ-2RKF9101X/P9.10KLTR-ND/1746291, PartId=273, Part Number=ERJ-2RKF9101X, Price=0.0043, Supplier 1=Digi-Key, Type="Thick Film"